# EAGLE board dengen1_small (EAGLE 9.6.2)
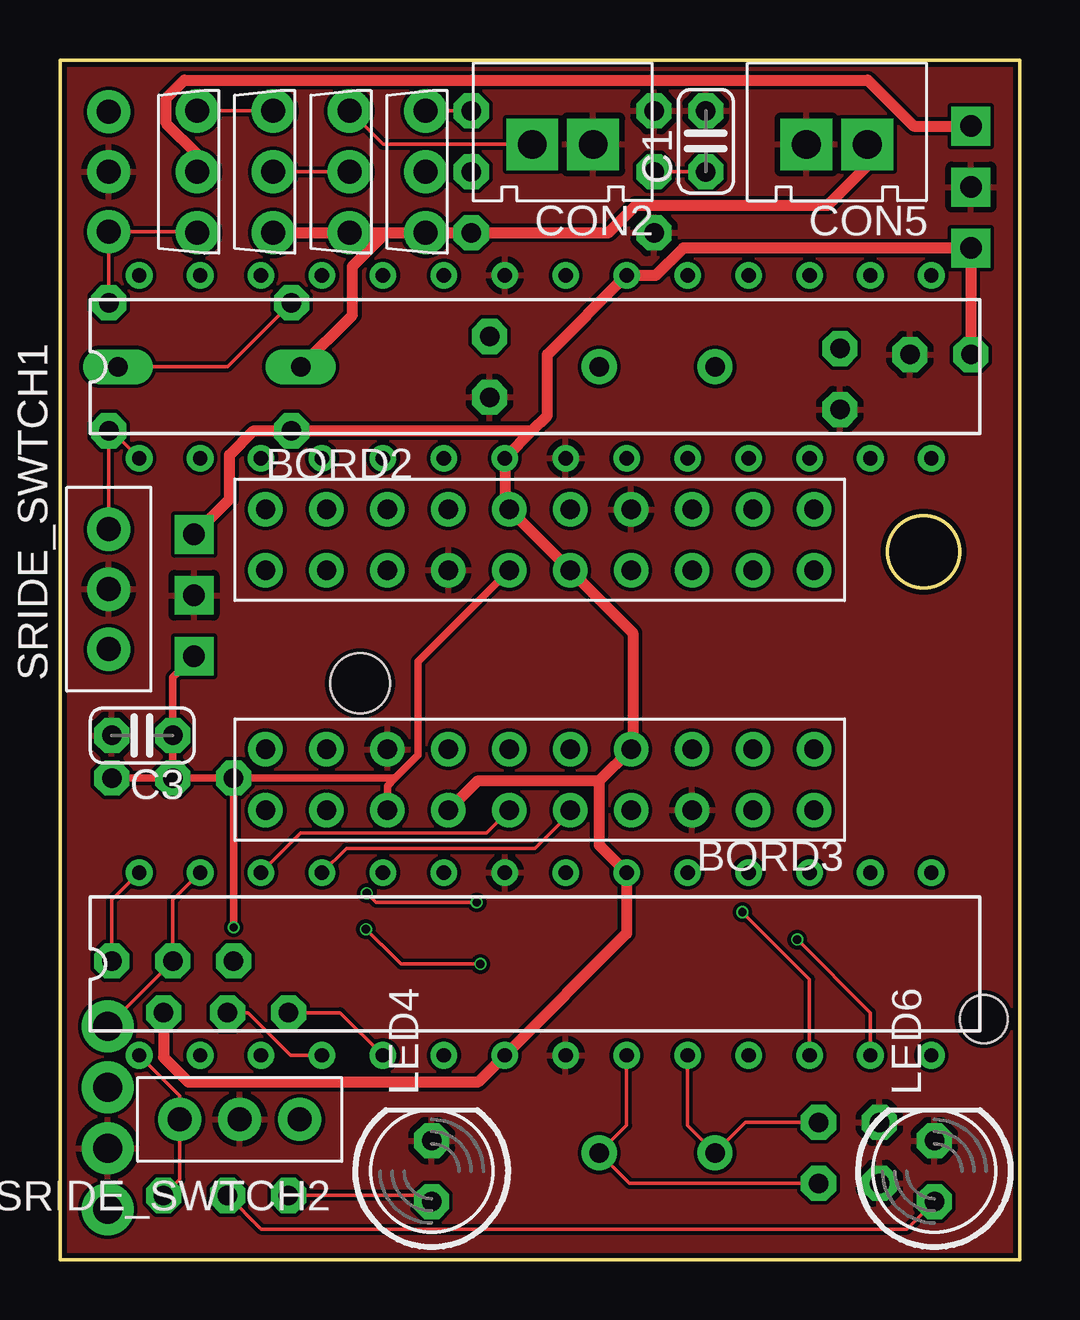
[diagram p0: board, top side]
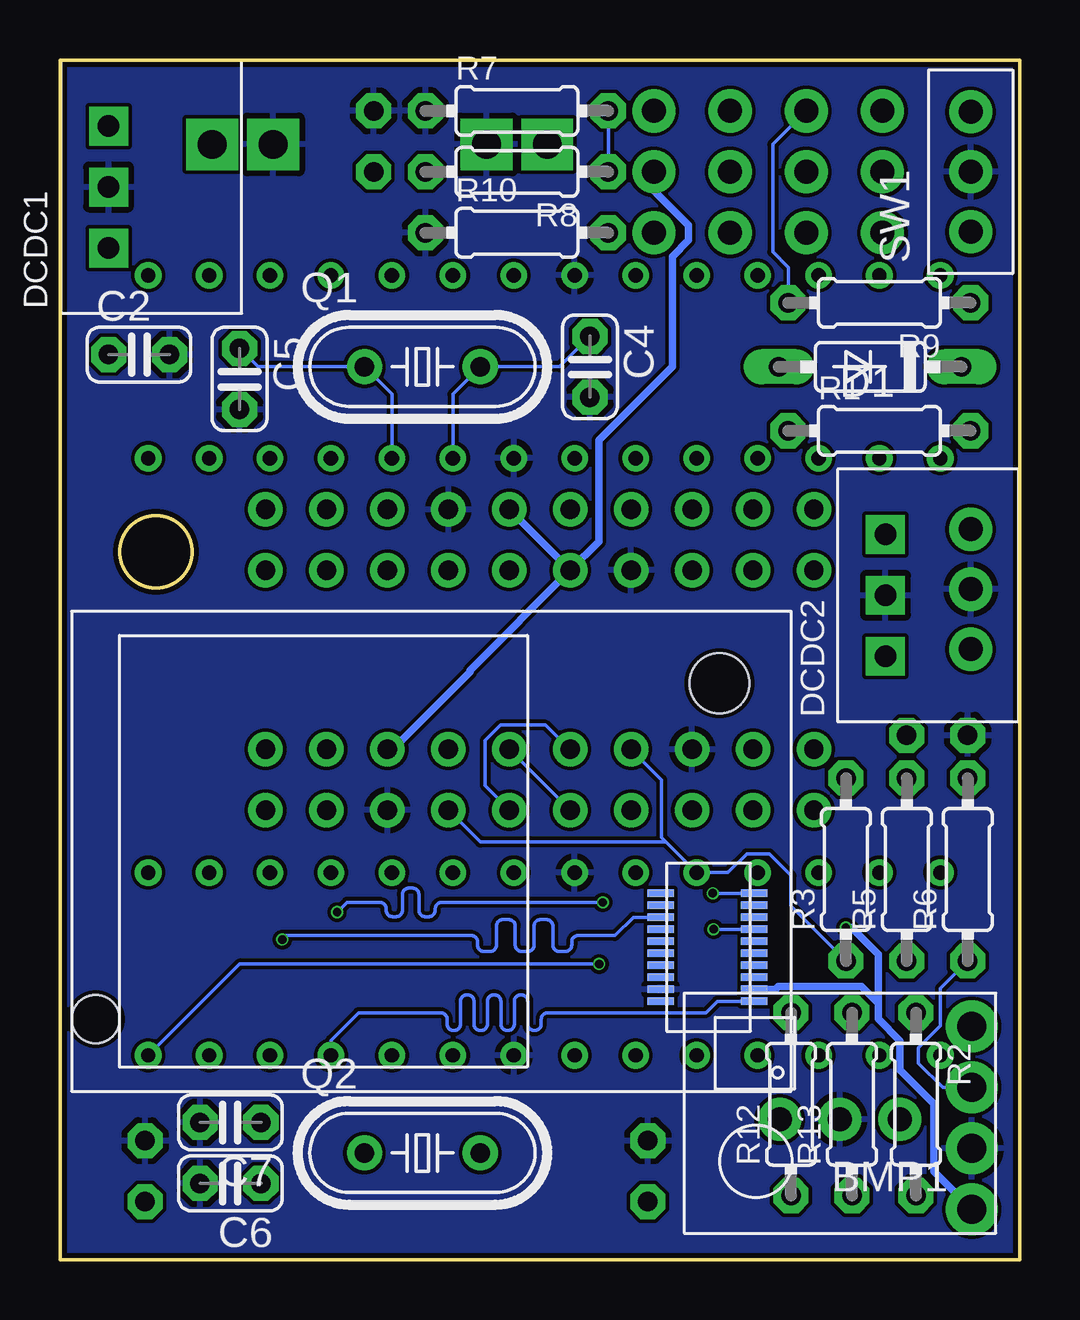
[diagram p1: board, bottom side, seen from below]

Size 40 x 50 mm. Coordinates in mm from the lower left corner, seen from the top.
Outline: 0,0 0,50 40,50 40,0 0,0
Outline: circle at 36,29.5 radius 1.5
Copper layers (1*16): Top 0.035mm / dielectric 1.6mm / Bottom 0.035mm
Design rules "jlcpcb-2layers": minimum track width 5mil, minimum drill 0.3mm, track to track 5mil, track to pad 5mil, pad to pad 5mil, via to via 5mil, smd to smd 5mil, copper to edge 0.2mm, drill to drill 6mil, minimum pad ring 10mil, minimum via ring 3mil, stop-mask expansion 4mil, vias tented up to drill 0mil, thermal gap 10mil
Net classes: 1 SIGNAL: width 0.152 mm, drill 0.152 mm, clearance 0.152 mm; 2 POWER_H: width 0.457 mm, drill 0.152 mm, clearance 0.152 mm; 3 POWER_L: width 0.305 mm, drill 0.152 mm, clearance 0.152 mm; 4 GND: width 0.305 mm, drill 0.152 mm, clearance 0.152 mm

## Footprints (pad centres in the part's own frame; a part is rotated, then mirrored left to right if it is on the bottom)
GY-68 = drill 1.2: P1 -5,4; P2 -5,1.46; P3 -5,-1.08; P4 -5,-3.62
2X10 = drill 0.8: P$1 0,1.27; P$2 0,-1.27; P$3 -2.54,1.27; P$4 -2.54,-1.27; P$5 -5.08,1.27; P$6 -5.08,-1.27; P$7 -7.62,1.27; P$8 -7.62,-1.27; P$9 -10.16,1.27; P$10 -10.16,-1.27; P$11 -12.7,1.27; P$12 -12.7,-1.27; P$13 -15.24,1.27; P$14 -15.24,-1.27; P$15 -17.78,1.27; P$16 -17.78,-1.27; P$17 -20.32,1.27; P$18 -20.32,-1.27; P$19 -22.86,1.27; P$20 -22.86,-1.27
C025-024X044 = drill 0.813 octagon: 1 -1.27,0; 2 1.27,0
2PIN = drill 1.2 square: P$1 -1.27,0; P$2 1.27,0
DO35-7 = drill 0.813 long: A 3.81,0; C -3.81,0
5V1A_M78AR05-1 = drill 0.9 pad 1.27 square: GND 0,0; VIN 2.54,0; VOUT -2.54,0
3.3V1A_M78AR033-1 = drill 0.9 pad 1.27 square: GND 0,0; VIN 2.54,0; VOUT -2.54,0
IM920_IM920C = smd 0.3 x 1.1: $P1 -1.75,-13.45; $P2 -1.75,-9.55; $P3 -2.25,-13.45; $P4 -2.25,-9.55; $P5 -2.75,-13.45; $P6 -2.75,-9.55; $P7 -3.25,-13.45; $P8 -3.25,-9.55; $P9 -3.75,-13.45; $P10 -3.75,-9.55; $P11 -4.25,-13.45; $P12 -4.25,-9.55; $P13 -4.75,-13.45; $P14 -4.75,-9.55; $P15 -5.25,-13.45; $P16 -5.25,-9.55; $P17 -5.75,-13.45; $P18 -5.75,-9.55; $P19 -6.25,-13.45; $P20 -6.25,-9.55 | hole 2.5: 7,-12 | hole 2: -7,14
LED5MM = drill 0.813 octagon: A -1.27,0; K 1.27,0
HC49/S = drill 0.813: 1 -2.413,0; 2 2.413,0
0204/7 = drill 0.813 octagon: 1 -3.81,0; 2 3.81,0
SRIDE_SWITCH = drill 1: L -2.5,0; LR 0,0; R 2.5,0
ATMEGA328P = drill 0.6: AREF 17.78,7.62; AVCC 20.32,7.62; D1TX 5.08,0; D2 7.62,0; D3 10.16,0; D4 12.7,0; D5 25.4,0; D6 27.94,0; D7 30.48,0; D8 33.02,0; D9 33.02,7.62; D14 12.7,7.62; D15 10.16,7.62; D16 7.62,7.62; D17 5.08,7.62; GND1 17.78,0; GND2 15.24,7.62; MISOD12 25.4,7.62; MOSID11 27.94,7.62; PB6 20.32,0; PB7 22.86,0; RESET 0,0; RXD0 2.54,0; SCKD13 22.86,7.62; SCLD19 0,7.62; SDAD18 2.54,7.62; SSD10 30.48,7.62; VCC 15.24,0
2SJ681 = drill 1: DRAIN 0,0; GATE 2.54,0; SOURCE -2.54,0
2SK4017 = drill 1: DRAIN 0,0; GATE 2.54,0; SOURCE -2.54,0

## Placement (x,y rotation side)
BMP1  BMP180  [GY-68]  6.99,6.1 180 bottom
BORD2  [2X10]  31.43,30 0 top
BORD3  [2X10]  8.57,20 180 top
C1  10uF  [C025-024X044]  26.92,46.61 90 top
C2  3.3uF  [C025-024X044]  36.7,37.72 0 bottom
C3  3.3uF  [C025-024X044]  3.43,21.84 180 top
C4  22p  [C025-024X044]  17.91,37.21 270 bottom
C5  22p  [C025-024X044]  32.51,36.7 270 bottom
C6  22p  [C025-024X044]  32.89,3.17 180 bottom
C7  22p  [C025-024X044]  32.89,5.71 180 bottom
CON2  [2PIN]  20.95,46.48 180 top
CON5  [2PIN]  32.38,46.48 180 top
D1  1N4148DO35-7  [DO35-7]  6.22,37.21 180 bottom
DCDC1  [5V1A_M78AR05-1]  37.97,44.7 90 bottom
DCDC2  [3.3V1A_M78AR033-1]  5.59,27.69 90 bottom
IM2  IM920_IM920C  [IM920_IM920C]  24.51,17.02 90 bottom
LED4  [LED5MM]  15.49,3.68 90 top
LED6  [LED5MM]  36.45,3.68 90 top
Q1  16mhz  [HC49/S]  24.89,37.21 0 bottom
Q2  16mhz  [HC49/S]  24.89,4.45 0 bottom
R1  [0204/7]  5.84,34.54 0 bottom
R2  [0204/7]  4.32,6.48 270 bottom
R3  [0204/7]  7.24,16.26 90 bottom
R5  10k  [0204/7]  4.7,16.26 90 bottom
R6  10k  [0204/7]  2.16,16.26 90 bottom
R7  10k  [0204/7]  20.95,47.88 0 bottom
R8  1k  [0204/7]  20.95,45.34 180 bottom
R9  100k  [0204/7]  5.84,39.88 180 bottom
R10  1k  [0204/7]  20.95,42.8 0 bottom
R12  100  [0204/7]  9.53,6.48 90 bottom
R13  100  [0204/7]  6.99,6.48 90 bottom
SRIDE_SWTCH1  SRIDE_SWITCH  [SRIDE_SWITCH]  2.03,27.94 90 top
SRIDE_SWTCH2  SRIDE_SWITCH  [SRIDE_SWITCH]  7.49,5.84 180 top
SW1  SRIDE_SWITCH  [SRIDE_SWITCH]  2.03,45.34 90 bottom
U$1  ATMEGA238P  [ATMEGA328P]  3.3,33.4 0 top
U$2  2SJ681-PCH  [2SJ681]  12.06,45.34 270 top
U$3  2SK4017-NCH  [2SK4017]  15.24,45.34 270 top
U$4  2SJ681-PCH  [2SJ681]  8.89,45.34 270 top
U$5  2SJ681-PCH  [2SJ681]  5.71,45.34 270 top
U$6  ATMEGA238P  [ATMEGA328P]  3.3,8.51 0 top

## Library data of the parts
BMP1 = BMP180
BORD2 BORD3 = PinSocket
C1-C7 = rcl; SPICEPREFIX: C
CON2 CON5 = XR Connector
D1 = diode
DCDC1 DCDC2 = DC-DC
IM2 = CANSAT12th
LED4 LED6 = led
Q1 Q2 = crystal; OC_FARNELL: 1667008; OC_NEWARK: unknown
R1-R3 R5-R10 R12 R13 = rcl; SPICEPREFIX: R
SRIDE_SWTCH1 SRIDE_SWTCH2 SW1 = Sride Switch
U$1 U$6 = atmega328p
U$2-U$5 = mosfet

## Nets
+3V3 [POWER_L]: BMP1.P1 BORD2.P$9 BORD2.P$12 BORD3.P$5 BORD3.P$16 C3.1 DCDC2.VOUT IM2.$P17 R3.2 R5.2 R6.2 U$3.DRAIN
+5V [POWER_H]: BORD2.P$10 BORD2.P$11 BORD3.P$7 BORD3.P$14 C2.1 DCDC1.VOUT DCDC2.VIN R1.1 R2.1 U$1.AVCC U$1.VCC U$6.AVCC U$6.VCC
+5V1 [POWER_H]: DCDC1.VIN U$5.DRAIN
BORDRX [SIGNAL]: BORD3.P$9 BORD3.P$12 U$6.D17
BORDTX [SIGNAL]: BORD3.P$10 BORD3.P$11 U$6.D16
FP [POWER_H]: CON5.P$1 D1.A R10.2 U$2.GATE U$3.GATE U$4.GATE
FP_CHECKER [SIGNAL]: C1.1 R8.2
GND [GND]: BMP1.P2 BORD2.P$7 BORD2.P$14 BORD3.P$6 BORD3.P$15 C1.2 C2.2 C3.2 C4.2 C5.2 C6.2 C7.2 CON2.P$1 CON5.P$2 DCDC1.GND DCDC2.GND IM2.$P18 LED4.K LED6.K R7.1 R10.1 SRIDE_SWTCH1.LR SRIDE_SWTCH2.LR SW1.LR U$1.GND1 U$1.GND2 U$6.GND1 U$6.GND2
IM_BUSY [SIGNAL]: IM2.$P1 U$6.D6
IM_RESET [SIGNAL]: IM2.$P19 U$6.D5
LED [SIGNAL]: IM2.$P15
LED1.0 [SIGNAL]: R13.2 U$6.D2
LED1.1 [SIGNAL]: R12.2 U$6.D3
N$1 [SIGNAL]: U$2.DRAIN U$4.DRAIN
N$2 [SIGNAL]: C6.1 Q2.2 U$6.PB6
N$3 [SIGNAL]: D1.C R9.2 U$4.SOURCE U$5.SOURCE
N$4 [SIGNAL]: C7.1 Q2.1 U$6.PB7
N$5 [SIGNAL]: C5.1 Q1.1 U$1.PB7
N$6 [SIGNAL]: R1.2 SRIDE_SWTCH1.R U$1.RESET
N$7 [SIGNAL]: C4.1 Q1.2 U$1.PB6
N$8 [SIGNAL]: R2.2 SRIDE_SWTCH2.R U$6.RESET
N$9 [SIGNAL]: LED6.A R13.1
N$10 [SIGNAL]: LED4.A R12.1
N$14 [SIGNAL]: R7.2 R8.1 U$3.SOURCE
N$20 [SIGNAL]: BORD3.P$17
RAW: CON2.P$2 U$2.SOURCE
RX_IM [SIGNAL]: IM2.$P6 U$6.D7
SCL [SIGNAL]: BMP1.P3 R6.1 U$6.SCLD19
SDA [SIGNAL]: BMP1.P4 R5.1 U$6.SDAD18
SERVO [SIGNAL]: BORD3.P$8 BORD3.P$13 R3.1 U$6.D15
SW [SIGNAL]: R9.1 SW1.L U$5.GATE
TX_IM [SIGNAL]: IM2.$P7 U$6.D8

## Tracks (layer width: path | path; a pad name or v marks a point on that pad's centre or on a via)
+3V3  (via drill 0.35)
  Top 0.305: BORD2.P$12 14.93,24.93 14.93,21.02 13.97,20.07 | R3.2 13.97,20.07 | BORD3.P$5 13.65,19.75 13.97,20.07 | R5.2 C3.1 4.7,24.26 DCDC2.VOUT | R5.2 R3.2 | R6.2 R5.2 | R3.2 v7.24,13.84
  Bottom 0.305: BORD2.P$12 BORD2.P$9 | BORD2.P$12 22.91,24.55 22.91,24.49 26.13,21.27 BORD3.P$16 | U$3.DRAIN 15.24,44.55 13.8,43.11 13.8,42.49 14.48,41.81 14.48,37.21 17.53,34.16 17.53,29.93 BORD2.P$12 | 5.89,10.69 5.89,10.03 4.98,9.12 4.98,7.9 3.57,6.49 3.57,3.68 BMP1.P1 | 5.89,10.69 6.6,11.39 10.04,11.39 10.17,11.27 IM2.$P17 | v7.24,13.84 7.02,13.84 5.89,12.72 5.89,10.69
+5V
  Top 0.457: 19.68,34.54 R1.1 8.08,34.54 7.07,33.53 7.07,31.7 DCDC2.VIN | 19.68,34.54 20.32,35.18 20.32,37.72 U$1.AVCC 24.84,41.02 25.98,42.16 DCDC1.VOUT C2.1 | BORD3.P$7 17.4,19.94 22.48,19.94 | 22.48,19.94 BORD3.P$14 23.88,21.34 23.88,26.12 BORD2.P$10 BORD2.P$11 18.54,31.46 U$1.VCC 19.68,34.54 | 22.48,19.94 22.48,17.27 U$6.AVCC 23.62,13.59 U$6.VCC 17.42,7.39 5.36,7.39 4.32,8.43 R2.1
+5V1
  Top 0.457: DCDC1.VIN 35.59,47.24 33.68,49.16 5.18,49.16 4.43,48.41 4.43,47.35 5.71,46.07 U$5.DRAIN
BORDRX
  Top 0.152: U$6.D17 10.03,17.78 17.78,17.78 BORD3.P$9
  Bottom 0.152: BORD3.P$9 BORD3.P$12
BORDTX
  Top 0.152: U$6.D16 11.94,17.14 19.81,17.14 21.27,18.6 BORD3.P$11
  Bottom 0.152: BORD3.P$11 21.27,18.75 22.28,19.76 22.28,21.64 21.64,22.28 19.76,22.28 18.75,21.27 BORD3.P$10
FP
  Top 0.457: U$4.GATE U$2.GATE 13.59,42.8 | 13.59,42.8 U$3.GATE R10.2 22.86,42.8 24,43.94 32,43.94 33.66,45.59 CON5.P$1 | D1.A 12.19,39.37 12.19,41.4 13.59,42.8
FP_CHECKER
  Top 0.152: R8.2 C1.1
GND
  pour Top: 1.27,-12.7 -8.89,-2.54 -8.89,43.18 11.43,63.5 90.17,63.5 97.79,63.5 118.11,43.18 118.11,2.54 102.87,-12.7
  pour Bottom: -8.89,45.72 7.62,62.23 100.33,62.23 118.11,44.45 118.11,3.81 102.87,-11.43 1.27,-11.43 -8.89,-1.27
IM_BUSY  (via drill 0.35)
  Top 0.152: v17.37,14.89 13.17,14.89 v12.79,15.27 | U$6.D6 31.24,11.68 v28.45,14.48
  Bottom 0.152: IM2.$P1 v12.79,15.27 | v28.45,14.48 28.04,14.89 26.67,14.89 arc90 26.4,14.62 26.4,14.56 arc-90 26.14,14.29 25.99,14.29 arc-90 25.72,14.56 25.72,15.22 arc90 25.45,15.48 25.31,15.48 arc90 25.04,15.22 25.04,14.56 arc-90 24.77,14.29 24.62,14.29 arc-90 24.36,14.56 24.36,14.62 arc90 24.09,14.89 v17.37,14.89
IM_RESET
  Bottom 0.152: IM2.$P19 12.6,10.77 13.08,10.29 19.67,10.29 arc-90 19.94,10.02 19.94,9.81 arc90 20.2,9.54 20.23,9.54 arc90 20.5,9.81 20.5,10.76 arc-90 20.77,11.03 20.79,11.03 arc-90 21.06,10.76 21.06,9.81 arc90 21.33,9.54 21.35,9.54 arc90 21.62,9.81 21.62,10.76 arc-90 21.89,11.03 21.91,11.03 arc-90 22.18,10.76 22.18,9.81 arc90 22.45,9.54 22.48,9.54 arc90 22.74,9.81 22.74,10.76 arc-90 23.01,11.03 23.04,11.03 arc-90 23.3,10.76 23.3,9.81 arc90 23.57,9.54 23.6,9.54 arc90 23.86,9.81 23.86,10.02 arc-90 24.13,10.29 27.56,10.29 28.7,9.14 U$6.D5
LED1.0
  Top 0.152: U$6.D2 9.62,8.51 7.84,10.29 R13.2
LED1.1
  Top 0.152: R12.2 11.68,10.29 U$6.D3
N$1
  Top 0.152: U$4.DRAIN U$2.DRAIN
N$2
  Top 0.152: U$6.PB6 23.62,5.59 Q2.2 23.75,3.17 C6.1
N$3
  Top 0.152: U$5.SOURCE U$4.SOURCE | D1.C 6.99,37.21 R9.2
  Bottom 0.152: U$4.SOURCE 10.29,46.48 10.29,42 9.63,41.34 9.63,39.9 R9.2
N$4
  Top 0.152: U$6.PB7 26.16,5.59 Q2.1 28.57,5.71 C7.1
N$5
  Bottom 0.152: U$1.PB7 26.16,36.07 Q1.1 31.75,37.21 C5.1
N$6
  Top 0.152: SRIDE_SWTCH1.R R1.2 2.16,34.54 U$1.RESET
N$7
  Bottom 0.152: C4.1 19.18,37.21 Q1.2 23.62,36.07 U$1.PB6
N$8
  Top 0.152: U$6.RESET 4.99,6.82 SRIDE_SWTCH2.R 4.99,3.34 R2.2
N$9
  Top 0.152: R13.1 8.38,1.27 35.31,1.27 LED6.A
N$10
  Top 0.152: LED4.A 15.24,2.67 R12.1
N$14
  Top 0.152: U$3.SOURCE R7.2
  Bottom 0.152: R7.2 R8.1
RAW
  Top 0.152: U$2.SOURCE 13.46,46.48 CON2.P$2
RX_IM  (via drill 0.35)
  Top 0.152: U$6.D7 33.78,10.16 33.78,10.29 v30.73,13.34
  Bottom 0.152: IM2.$P6 16.1,14.27 16.87,13.51 18.4,13.51 arc-90 18.67,13.24 18.67,13.11 arc90 18.93,12.84 19.18,12.84 arc90 19.45,13.11 19.45,13.9 arc-90 19.72,14.17 19.97,14.17 arc-90 20.24,13.9 20.24,13.11 arc90 20.5,12.84 20.76,12.84 arc90 21.02,13.11 21.02,13.9 arc-90 21.29,14.17 21.54,14.17 arc-90 21.81,13.9 21.81,13.11 arc90 22.07,12.84 22.33,12.84 arc90 22.59,13.11 22.59,13.24 arc-90 22.86,13.51 30.56,13.51 v30.73,13.34
SCL
  Top 0.152: R6.1 2.16,14.99 U$6.SCLD19
  Bottom 0.152: R6.1 3.3,11.3 3.3,9.74 4.21,8.83 4.21,8.19 3.2,7.18 BMP1.P3
SDA
  Top 0.152: BMP1.P4 4.7,12.43 R5.1 4.7,14.99 U$6.SDAD18
SERVO
  Bottom 0.152: 14.73,17.4 U$6.D15 12.16,16.13 11.37,16.91 10.44,16.91 9.53,16 9.53,14.73 R3.1 | 14.73,17.4 22.48,17.4 BORD3.P$13 | BORD3.P$8 14.92,20 14.92,17.59 14.73,17.4
SW
  Top 0.152: R9.1 SW1.L 5.67,42.84 U$5.GATE
TX_IM  (via drill 0.35)
  Top 0.152: v12.75,13.77 13.39,13.13 13.41,13.13 14.22,12.32 v17.53,12.32
  Bottom 0.152: IM2.$P7 v12.75,13.77 | U$6.D8 32.51,12.32 v17.53,12.32